# Altium PCB nse5310-module.PcbDoc
Units mm, origin at the board's own origin, x right, y up, seen from the top; angles counter-clockwise.
Board outline 25 x 25 mm, 2 copper layers (Top Layer, Bottom Layer), stack 1.581 mm thick; 22 components, 23 nets, 126 pads, 31 vias.
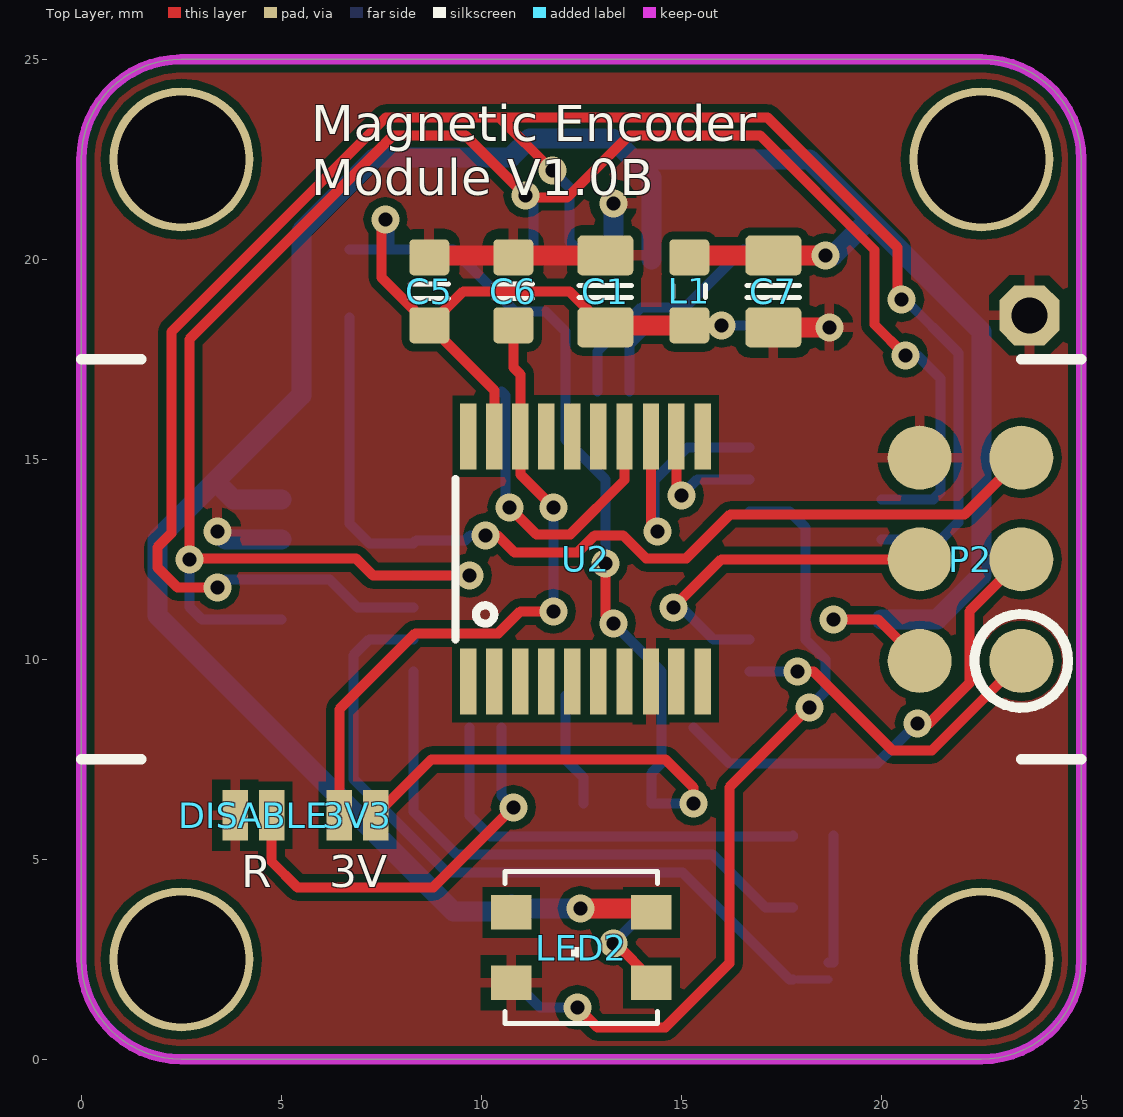
[diagram p0: Top Layer view]
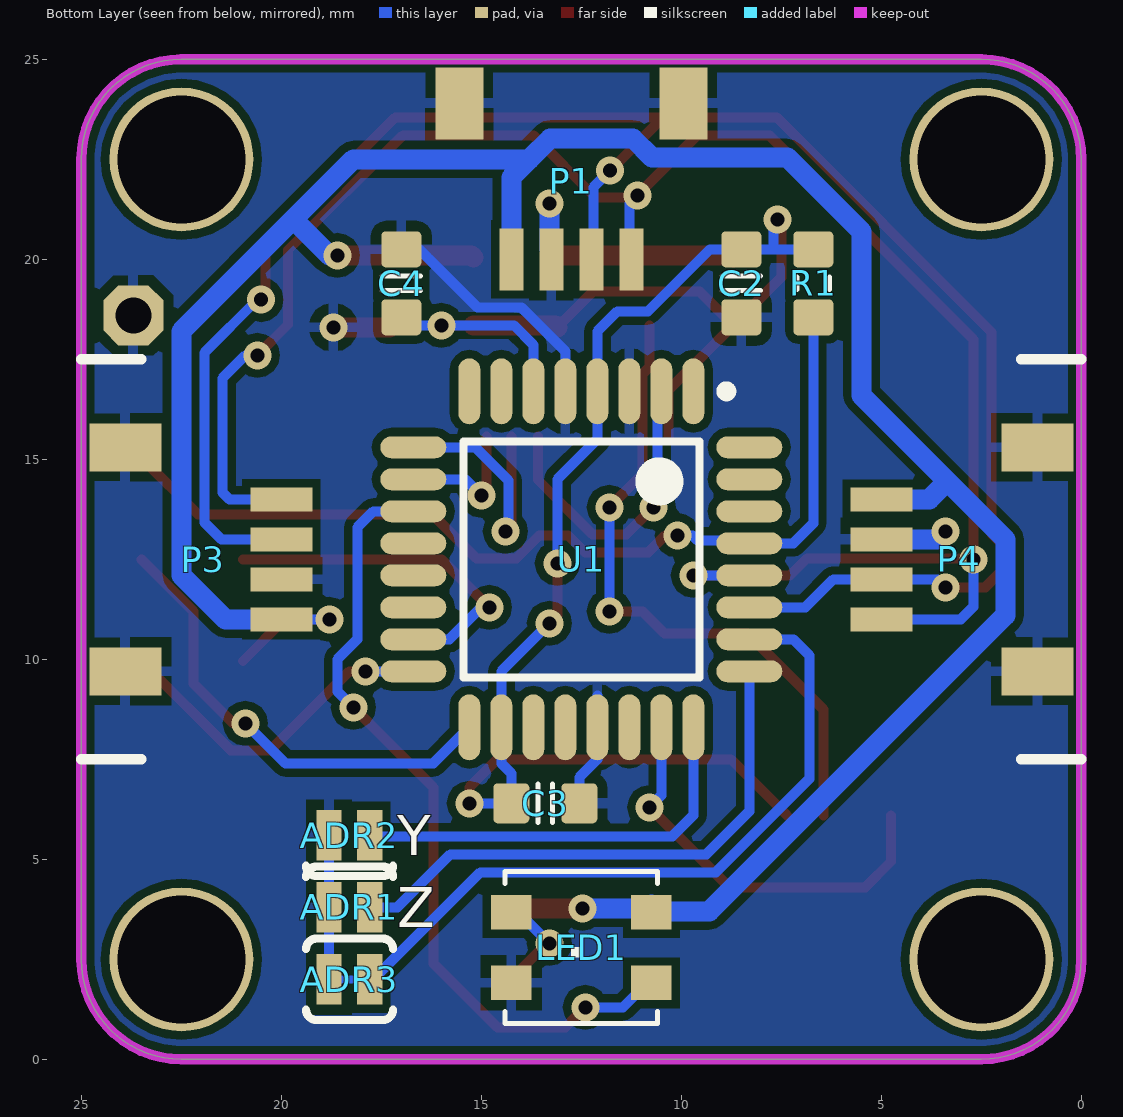
[diagram p1: Bottom Layer view, seen from below]
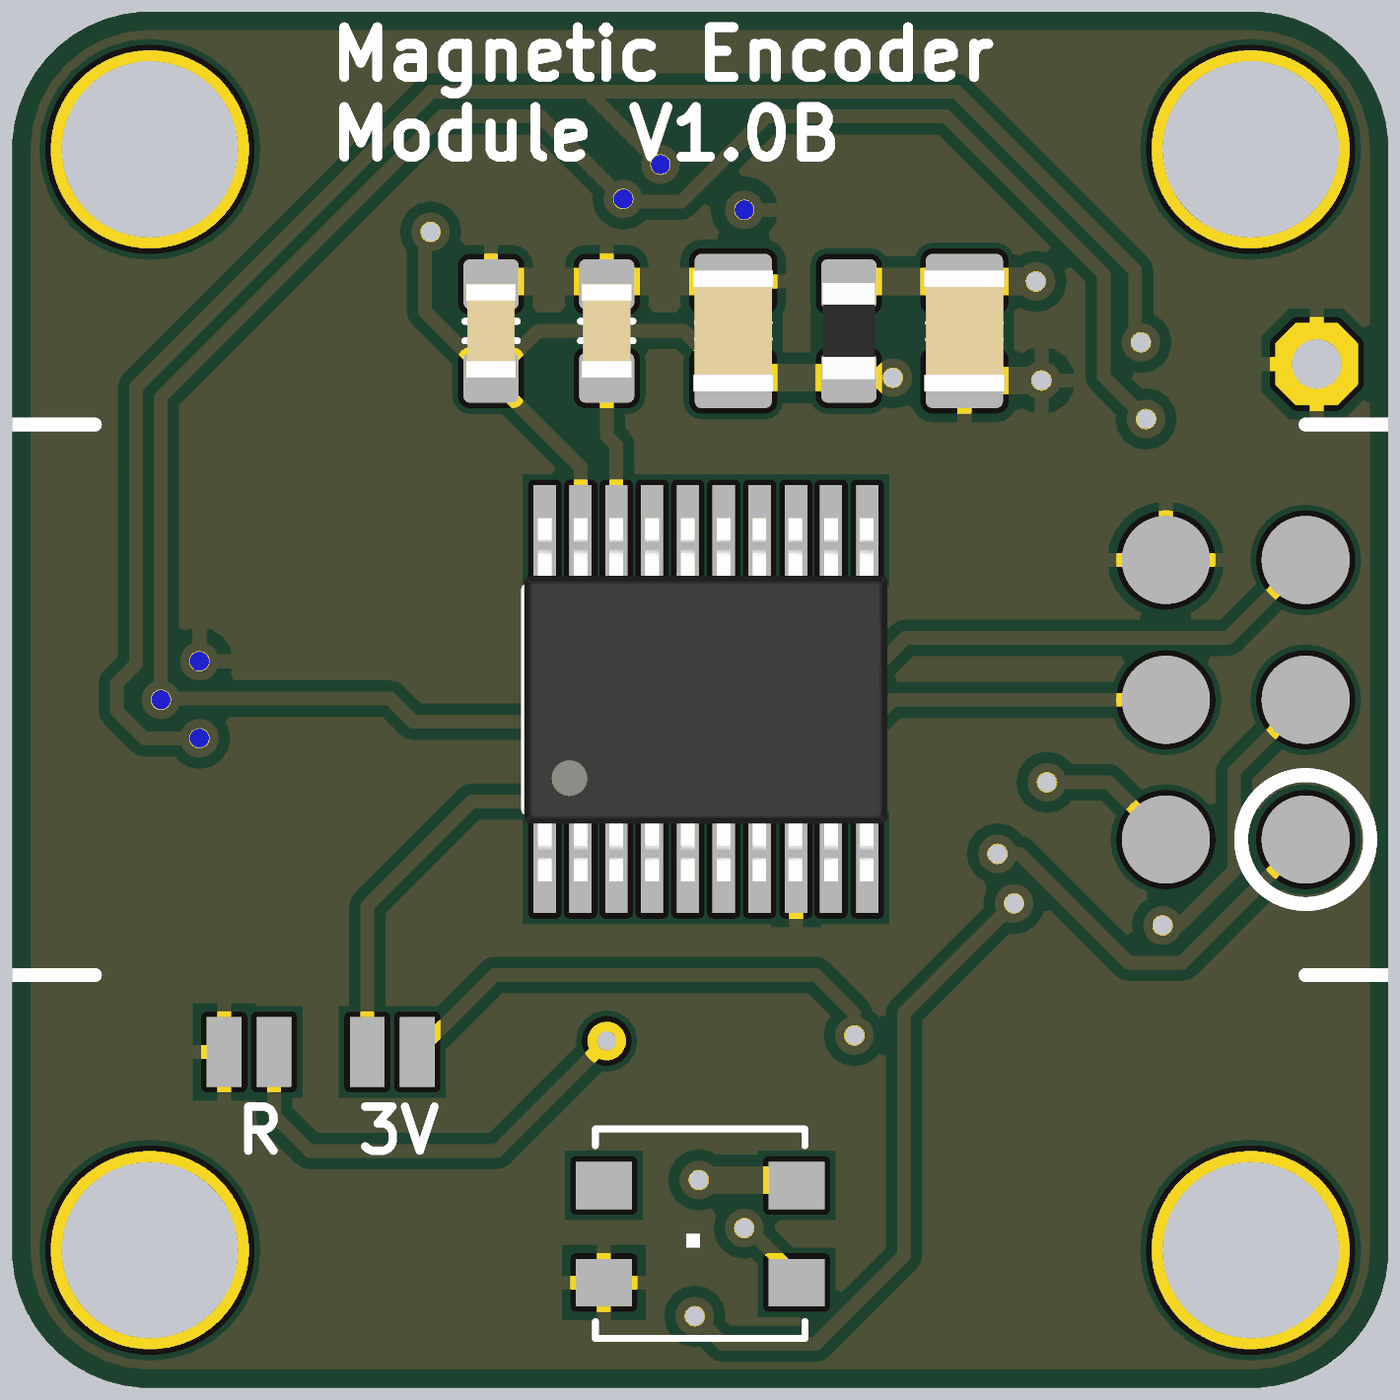
[diagram p2: 3D render of the assembled board from above, using the file's embedded part models]
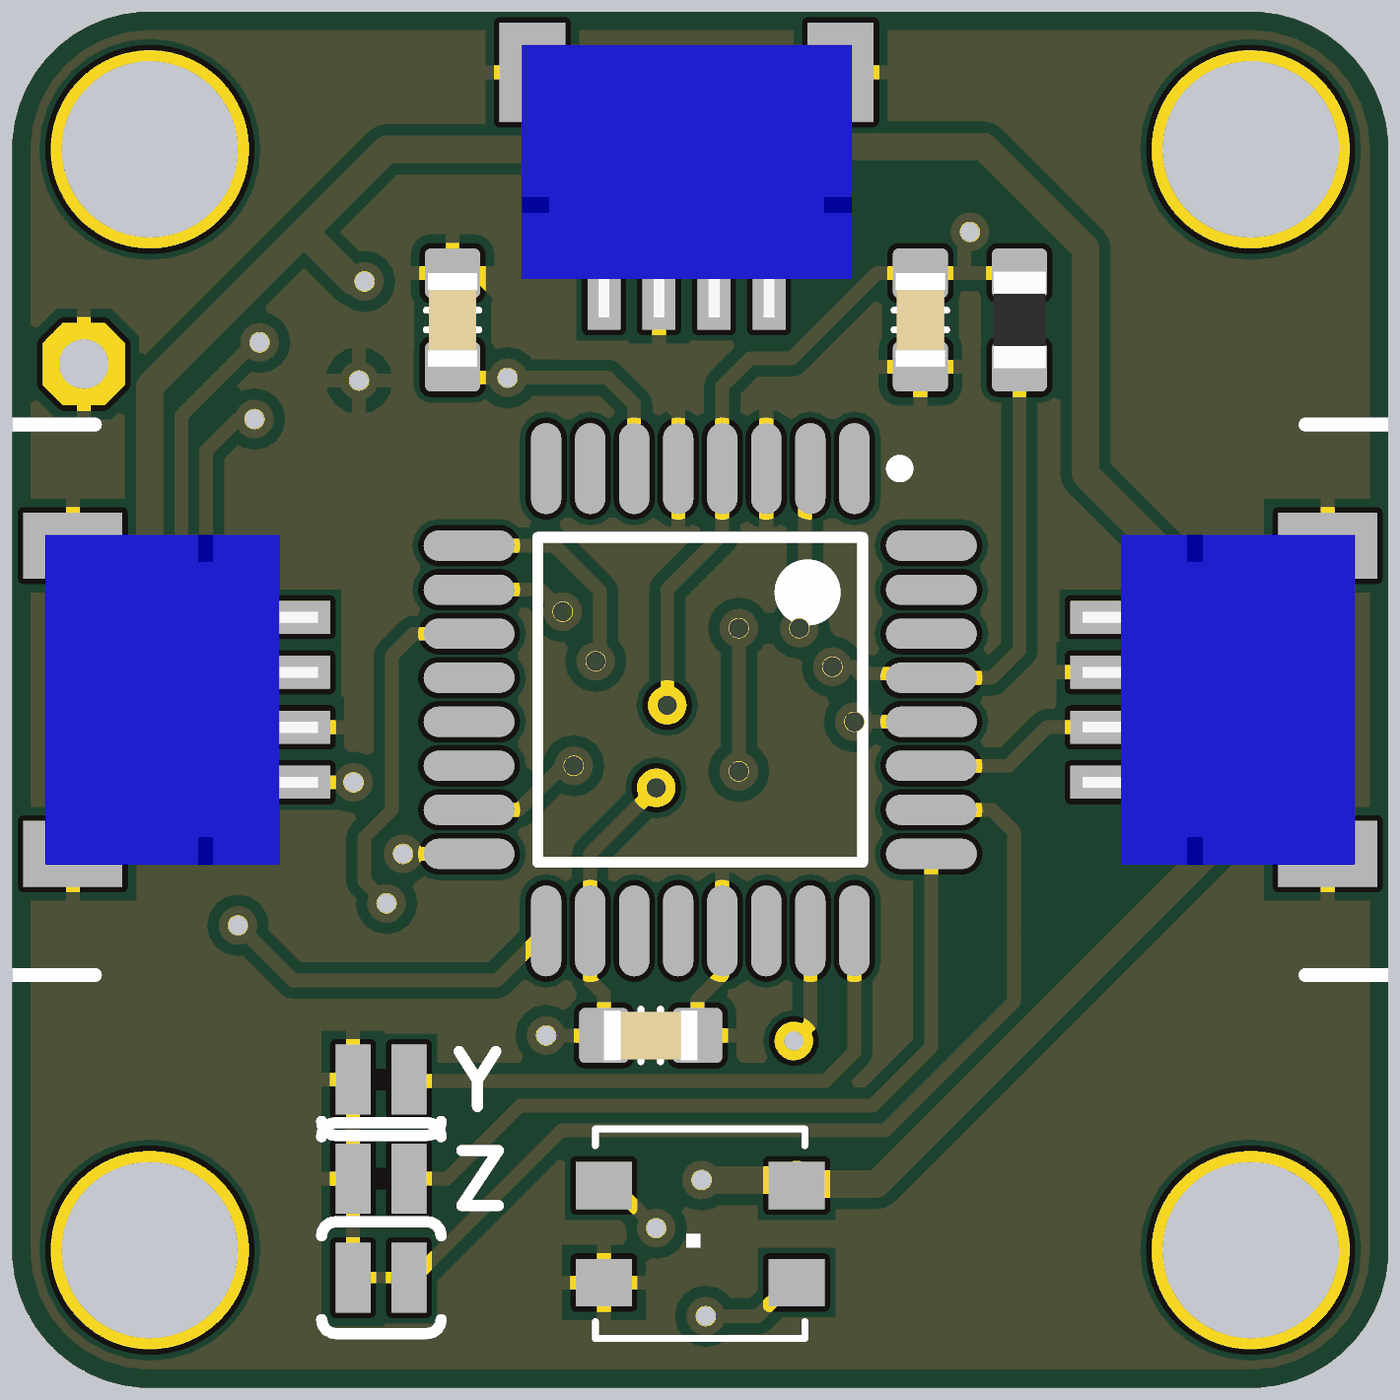
[diagram p3: 3D render of the assembled board from below, using the file's embedded part models]

## Layer stack, top to bottom
Top Solder: solder mask 0.0102, Solder Resist, Dk 3.5
Top Layer: signal copper 0.0356
Dielectric1: dielectric 1.51, FR-4, Dk 4.8
Bottom Layer: signal copper 0.0356
Bottom Solder: solder mask 0.0102, Solder Resist, Dk 3.5

## Board outline
0,2.5 0,22.5 cw(c2.5,22.5) 2.5,25 22.5,25 cw(c22.5,22.5) 25,22.5 25,2.5 cw(c22.5,2.5) 22.5,0 2.5,0 cw(c2.5,2.5)

## Design rules (kind name [scope] priority, off if disabled: settings)
Clearance [All] p1: gap=0.2
FabricationTestPointUsage TestPointUsage [All] p1: valid=0 allowmultiple=FALSE
FabricationTestpoint Testpoint [All] p1: side=3 testpointundercomponent=TRUE minsize=1.016 maxsize=2.54 preferedsize=1.524 minholesize=0 maxholesize=1.016 preferedholesize=0.813 testpointgrid=0.025 allowsidetop=TRUE allowsidebottom=TRUE usegrid=TRUE gridtolerance=0
HoleSize [All] p1: absolutevalues=TRUE maxlimit=3.5 minlimit=0.025 maxpercent=80.000 minpercent=20.000
PolygonConnect [All] p1: connectstyle=Relief reliefconductorwidth=0.254 reliefentries=4 polygonreliefangle="90 Angle" airgapwidth=0.254
RoomDefinition RoomDefinition_1 [InComponentClass('Top Side Components')] p1: confinementstyle=ConfineOut formatcopy=TRUE lockcomponents=FALSE outline 25.5,7.5 16.5,7.5 16.5,17.5 25.5,17.5
RoomDefinition [InComponentClass('Top Side Components')] p2: confinementstyle=ConfineOut formatcopy=TRUE lockcomponents=FALSE outline 9,7.5 -0.5,7.5 -0.5,17.5 9,17.5
RoutingVias [All] p1: holewidth=0.35 width=0.7 viastyle="Through Hole" minholewidth=0.35 minwidth=0.7 maxholewidth=1 maxwidth=1.4
SilkToSolderMaskClearance SilkscreenOverComponentPads [IsPad] p1: minsilkscreentomaskgap=0.254 clearancetoexposedcopper=TRUE
SolderMaskExpansion [All] p1: expansion=0.102
Width [All] p1: maxlimit=1 minlimit=0.25 preferedwidth=0.25
26 further rules are at their usual default settings.

## Components (designator, comment, footprint, x,y, rotation, side; value= is the part's Value field where it differs from the comment)
3V3 "JUMPER-PAD-2-NO" PAD-JUMPER-2-NO_NO_SILK 6.9,6.1 r0 top
ADR1 "JUMPER-PAD-2-NC_BY_TRACE" PAD-JUMPER-2-NC_BY_TRACE_YES_SILK#1 18.3,3.8 r180 bottom
ADR2 "JUMPER-PAD-2-NC_BY_TRACE" PAD-JUMPER-2-NC_BY_TRACE_YES_SILK#1 18.3,5.6 r180 bottom
ADR3 "JUMPER-PAD-2-NC_BY_TRACE" PAD-JUMPER-2-NC_BY_TRACE_YES_SILK#2 18.3,2 r180 bottom
C1 "approved sub OK" CAPC2012X135N 13.1,19.2 r90 top
C2 "approved sub OK" CAPC1608X90N 8.5,19.4 r270 bottom
C3 "approved sub OK" CAPC1608X90N 13.4,6.4 r180 bottom
C4 "approved sub OK" CAPC1608X90N 17,19.4 r90 bottom
C5 "approved sub OK" CAPC1608X90N 8.7,19.2 r90 top
C6 "approved sub OK" CAPC1608X90N 10.8,19.2 r90 top
C7 "approved sub OK" CAPC2012X135N 17.3,19.2 r270 top
DISABLE "JUMPER-PAD-2-NO" PAD-JUMPER-2-NO_NO_SILK 4.3,6.1 r0 top
L1 "7447965" RESC1608X55N 15.2,19.2 r270 top
LED1 "WS2812B3535" LED3535 12.5,2.8 r0 bottom
LED2 "WS2812B3535" LED3535 12.5,2.8 r180 top
P1 "JST-SH 4P" SM04B-SRSS-TB 14.25,20 r90 bottom locked
P2 "ISP" "ICSP Pads - SMD" 23.5,9.96 r180 top
P3 "JST-SH 4P" SM04B-SRSS-TB 20,11 r0 bottom locked
P4 "JST-SH 4P" SM04B-SRSS-TB 5,14 r180 bottom locked
R1 "Thick Film" RESC1608X55N 6.7,19.4 r270 bottom
U1 "ATmega328-AU" 32A_N 12.5,12.5 r270 bottom locked
U2 "NSE-5310" NSE-5310 13.25,12.5 r0 top

## Footprints (in the part's own frame and the unit in brackets; to place one, negate y for a bottom-side part, rotate by r counter-clockwise, add the part's x,y. Pads: shape width x height; smd on the part's side, far side on the other; paste and mask are expansions set on the pad)
32A_N [mm] "Thin QFP, 32-Leads, Body 7x7mm, Pitch 0.8mm, IPC Medium Density"
  oval 1.65x0.55 smd: 1(-4.2,2.8) 2(-4.2,2) 3(-4.2,1.2) 4(-4.2,0.4) 5(-4.2,-0.4) 6(-4.2,-1.2) 7(-4.2,-2) 8(-4.2,-2.8) 17(4.2,-2.8) 18(4.2,-2) 19(4.2,-1.2) 20(4.2,-0.4) 21(4.2,0.4) 22(4.2,1.2) 23(4.2,2) 24(4.2,2.8)
  oval 0.55x1.65 smd: 9(-2.8,-4.2) 10(-2,-4.2) 11(-1.2,-4.2) 12(-0.4,-4.2) 13(0.4,-4.2) 14(1.2,-4.2) 15(2,-4.2) 16(2.8,-4.2) 25(2.8,4.2) 26(2,4.2) 27(1.2,4.2) 28(0.4,4.2) 29(-0.4,4.2) 30(-1.2,4.2) 31(-2,4.2) 32(-2.8,4.2)
  silkscreen extent -4.32,-2.95 2.95,3.75, body extent -3.5,-3.5 3.5,3.5, height 1.2
CAPC1608X90N [mm] "Chip Capacitor, Body 1.6x0.8mm, EIA 0603, IPC Medium Density"
  round 0.254 on Mech15: 0(0,0)
  rrect25% 0.9x1 smd: 1(-0.85,0) 2(0.85,0)
  Top Layer pour cut-out: -0.6,0.5 -0.4,0.7 0.4,0.7 0.6,0.5 0.6,-0.5 0.4,-0.7 -0.4,-0.7 -0.6,-0.5
  silkscreen extent -0.18,-0.48 0.18,0.48, body extent -0.85,-0.45 0.85,0.45, height 0.89
CAPC2012X135N [mm] "Chip Capacitor, Body 2.0x1.2mm, EIA 0805, IPC Medium Density"
  round 0.254 on Mech15: 0(0,0)
  rrect25% 1x1.4 smd: 1(-0.9,0) 2(0.9,0)
  Top Layer pour cut-out: -0.675,0.7 -0.475,0.9 0.475,0.9 0.675,0.7 0.675,-0.7 0.475,-0.9 -0.475,-0.9 -0.675,-0.7
  silkscreen extent -0.15,-0.65 0.15,0.65, body extent -1.1,-0.72 1.1,0.73, height 1.34
"ICSP Pads - SMD" [mm]
  round 1.6 smd: 0(0,0) 1(2.54,0) 2(0,-2.54) 3(2.54,-2.54) 4(0,-5.08) 5(2.54,-5.08)
  silkscreen extent -1.17,-1.17 1.17,1.17
LED3535 [mil]
  rect 40x34 smd: 1(-68.9,35) 2(-68.9,-34.45) 3(69,-34.45) 4(69,35)
  silkscreen extent -75,-75 75,75
NSE-5310 [mil]
  rect 16x65 smd: 1(-140.75,-120.08) 2(-115.16,-120.08) 3(-89.57,-120.08) 4(-63.98,-120.08) 5(-38.39,-120.08) 6(-12.8,-120.08) 7(13,-120.08) 8(39,-120.08) 9(64,-120.08) 10(90,-120.08) 11(90,121) 12(64,121) 13(39,121) 14(13,121) 15(-12.8,121) 16(-38.39,121) 17(-63.98,121) 18(-89.57,121) 19(-115.16,121) 20(-140.75,121)
  silkscreen extent -154,-79 -115,79, body extent -156,-130 104,130, height 47
PAD-JUMPER-2-NC_BY_TRACE_YES_SILK#1 [mm]
  rect 0.635x1.27 smd: 1(-0.508,0) 2(0.508,0)
  silkscreen extent -1.08,0.76 1.09,1.02
PAD-JUMPER-2-NC_BY_TRACE_YES_SILK#2 [mm]
  rect 0.635x1.27 smd: 1(-0.508,0) 2(0.508,0)
  Top Layer lines w0.203: 0.381,0 -0.381,0
  silkscreen extent -1.08,-1.02 1.09,1.02
PAD-JUMPER-2-NO_NO_SILK [mm]
  rect 0.635x1.27 smd: 1(-0.45,0) 2(0.457,0)
RESC1608X55N [mm] "Chip Resistor, Body 1.6x0.8mm, EIA 0603, IPC Medium Density"
  round 0.254 on Mech15: 0(0,0)
  rrect25% 0.9x1 smd: 1(-0.85,0) 2(0.85,0)
  Top Layer pour cut-out: -0.6,0.5 -0.4,0.7 0.4,0.7 0.6,0.5 0.6,-0.5 0.4,-0.7 -0.4,-0.7 -0.6,-0.5
  silkscreen extent -0.15,-0.41 0.15,0.41, body extent -0.87,-0.47 0.88,0.48, height 0.54
SM04B-SRSS-TB [mm]
  rect 1.55x0.6 smd: 0(0,0) 1(0,-1) 2(0,-2) 3(0,-3)
  rect 1.8x1.2 smd: ""(3.9,-4.3) ""(3.9,1.3)
  body extent -0.55,-4.5 4.4,1.5, height 2.96

## Part data
C1 C7: library part CAPC_10u_0805_10V, "Capacitor SMD Cer 10uF 10% 10V X5R 0805"
C2 C3 C4 C5: library part CAPC_100n_0603_X7R_50V_10%, "Capacitor SMD Cer 100nF 10% 50V X7R 0603"
C6: library part CAPC_2u2_0603_10V_10%, "Capacitor SMD Cer 2.2uF 10% 10V X5R 0603"
L1: "SMD-Multilayer Inductor WE-MI, L = 1.00 µH"
P1 P3 P4: library part SM04B-SRSS-TB
P2: library part "ISP Header"
R1: library part RES_10K_0603_5%, "Resistor SMD chip 10k Ohm 0.1W 5% 0603"
U1: "8-bit AVR Microcontroller, 32KB Flash, 1KB EEPROM, 2KB SRAM, 32-pin TQFP, Industrial Grade (-40°C to 85°C)"

## Free pads (board coordinates)
  round 3.6 hole 3.2: 0(2.5,2.5) 0(2.5,22.5) 0(22.5,2.5) 0(22.5,22.5)
  oct 1.5x1.5 hole 0.9: 2(23.7,18.6)

## Via types
v1: diameter 0.7, hole 0.35, Top Layer to Bottom Layer, tented both sides, 28 vias
v2: diameter 0.7, hole 0.35, Top Layer to Bottom Layer, 3 vias

## Nets (pads, with @x,y where several pads share a name; then routed paths per layer and width w, separated by ;. In a path a pad name is that pad's centre, name@x,y a point inside that pad or via, vN(x,y) a via of type N, cw(c..) or ccw(c..) an arc to the next point about the centre after c; other vN are vias at no path point)
A: U2.4
ADR1: ADR1.2 U1.25 | length 14
  Bottom Layer w0.25: U1.25 8.3,6.2 9.375,5.125 15.775,5.125 17.1,3.8 ADR1.2
ADR2: ADR2.2 U1.24 | length 10.5
  Bottom Layer w0.25: U1.24 9.7,6.1 10.225,5.575 17.792,5.575 ADR2.2
ADR3: ADR3.2 U1.26 | length 17.8
  Bottom Layer w0.25: U1.26 7.2,10.5 6.8,10.1 6.8,7.013 9.138,4.675 15.025,4.675 17.7,2 ADR3.2
B: U2.5
CLK: U1.9 U2.13 | length 6.5
  Top Layer w0.25: U2.13 14.241,13.241 14.281,13.2 v1(14.4,13.2)
  Bottom Layer w0.25: v1(14.4,13.2) 14.325,13.275 14.325,14.475 15.15,15.3 U1.9
CSN: U1.2 U2.14 | length 7.9
  Top Layer w0.25: v1(10.7,13.8) 11.375,13.125 12.225,13.125 13.58,14.48 U2.14
  Bottom Layer w0.25: U1.2 10.6,16.6 10.6,14 10.8,13.8 v1(10.7,13.8)
DIO: U1.10 U2.12 | length 3.4
  Top Layer w0.25: U2.12 14.876,14.224 v1(15,14.1)
  Bottom Layer w0.25: v1(15,14.1) 15.4,14.5 U1.10
GND: ADR1.1 ADR2.1 ADR3.1 C1.2 C2.2 C3.2 C4.2 C5.2 C6.2 C7.2 DISABLE.1 LED1.4 LED2.4 P1. P1.1 P2.5 P3. P3.1 P4. P4.1 pad.2 U1.3 U1.5 U1.21 U2.8 | length 21
  Top Layer w0.5: C5.2 8.75,20.1 C1.2 ; C7.2 v1(18.7,18.3)
  Bottom Layer w0.25: U1.21@12.1,9.1 U1.21 12.1,7.5 12.55,7.05 C3.2 ; U1.5 12.9,17.7 14,18.8 15.1,18.8 16.55,20.25 C4.2 ; ADR3.1@18.681,2.427 18.808,2.427 ADR1.1 ADR2.1
  Bottom Layer w0.5: v1(3.4,13.2) 3.6,13 P4.1 ; P1.1@13.3,20.25 v1(13.3,21.4)
I: U2.7
MISO: P2.0 U1.16 | length 8.5
  Top Layer w0.25: v1(17.9,9.7) 18.3,9.7 20.275,7.725 21.265,7.725 P2.0
  Bottom Layer w0.25: U1.16 v1(17.9,9.7)
MOSI: P2.3 U1.15 | length 9.2
  Top Layer w0.25: v1(14.8,11.3) 16,12.5 P2.3
  Bottom Layer w0.25: v1(14.8,11.3) 14.8,11.5 15.8,10.5 U1.15
NEOPIXEL: LED2.3
Net3V3_1: 3V3.1 C6.1 U2.18 | length 16.6
  Top Layer w0.25: 3V3.1 6.45,8.75 8.35,10.65 9.795,10.65 10.425,10.65 10.975,11.2 v1(11.8,11.2) ; C6.1 10.8,17.3 10.975,17.125 U2.18 10.975,14.625 v1(11.8,13.8)
  Bottom Layer w0.25: v1(11.8,11.2) v1(11.8,13.8)
NetDISABLE_2: DISABLE.2 U1.23 | length 10.4
  Top Layer w0.25: DISABLE.2 4.757,4.943 5.4,4.3 8.8,4.3 v2(10.8,6.3)
  Bottom Layer w0.25: U1.23 10.5,6.6 v2(10.8,6.3)
NetLED1_3: LED1.3 LED2.1 | length 2.6
  Top Layer w0.25: v1(13.3,2.9) 13.361,2.9 LED2.1@14.25,2.011
  Bottom Layer w0.25: v1(13.3,2.9) 14.175,3.775 LED1.3@14.253,3.775
RST: P2.4 R1.2 U1.29 | length 23.9
  Top Layer w0.25: v1(10.1,13.1) 10.4,13.1 10.825,12.675 12.411,12.675 12.836,13.1 13.545,13.1 14.12,12.525 15.125,12.525 16.225,13.625 22.085,13.625 P2.4
  Bottom Layer w0.25: R1.2 6.7,13.4 7.2,12.9 U1.29 8.375,12.975 9.6,12.975 9.725,13.1 v1(10.1,13.1)
SCK: P2.2 U1.17 | length 11.7
  Top Layer w0.25: v1(20.9,8.4) 21.2,8.4 22.2,9.4 22.2,11.2 P2.2
  Bottom Layer w0.25: U1.17 16.2,7.4 19.9,7.4 v1(20.9,8.4)
SCL: P1.3 P3.3 P4.3 U1.28 | length 49.6
  Top Layer w0.25: v1(2.7,12.5) v1@2.7,12.525 ; v1(9.7,12.1) 7.286,12.1 6.861,12.525 v1@2.7,12.525 ; v1(20.6,17.6) 19.832,18.368 19.832,20.232 16.964,23.1 13.7,23.1 12.148,21.548 11.152,21.548 v1(11.1,21.6) 9.6,23.1 7.8,23.1 2.7,18 v1@2.7,12.525
  Bottom Layer w0.25: v1(2.7,12.5) 2.7,11.313 3.013,11 P4.3 ; U1.28 v1(9.7,12.1) ; v1(11.1,21.6) 11.3,21.4 11.3,20.05 P1.3 ; P3.3 21.3,14 21.475,14.175 21.475,17.025 20.9,17.6 v1(20.6,17.6)
SDA: P1.2 P3.2 P4.2 U1.27 | length 48.8
  Top Layer w0.25: v1(3.4,11.8) 2.4,11.8 1.9,12.3 1.9,12.8 2.25,13.15 2.25,18.186 7.614,23.55 10.45,23.55 ; v1(11.777,22.223) 10.45,23.55 ; v1(20.507,18.993) 20.4,19.1 20.4,20.3 17.15,23.55 10.45,23.55
  Bottom Layer w0.25: v1(3.4,11.8) 3.6,12 P4.2 6.2,12 6.9,11.3 U1.27 ; v1(11.777,22.223) 12.2,21.8 12.2,20.45 12.4,20.25 12.2,20.05 P1.2 ; P3.2 21.5,13 21.925,13.425 21.925,17.662 20.593,18.993 v1(20.507,18.993)
VDD: 3V3.2 C1.1 C2.1 C3.1 C4.1 C5.1 L1.2 R1.1 U1.4 U1.6 U1.18 U2.19 | length 49.5
  Top Layer w0.25: 3V3.2 8.757,7.5 14.6,7.5 15.3,6.8 v1(15.3,6.4) ; v1@7.5,20.9 7.5,19.55 C5.1 ; U2.19 10.325,16.725 C5.1 ; v2(13.1,12.4) 13.1,11.1 v2(13.3,10.9) ; C1.1 12.2,19.2 9.55,19.2 C5.1 ; L1.2 15.25,18.3 15.3,18.35 v1(16,18.35)
  Top Layer w0.5: C1.1 13.15,18.35 L1.2
  Bottom Layer w0.25: R1.1 7.7,20.25 ; v1@7.5,20.9 7.7,20.7 7.7,20.25 ; v2(13.1,12.4) 13.1,14.5 12.1,15.5 U1.4 12.1,18.2 11.6,18.7 10.836,18.7 9.286,20.25 C2.1 7.7,20.25 ; v2(13.3,10.9) 14.5,9.7 U1.18 14.5,7.4 14.25,7.15 C3.1 v1(15.3,6.4) ; U1.6 13.7,17.864 14.186,18.35 v1(16,18.35) 16.8,18.35 C4.1
  other v1: 7.6,21
VIN: C7.1 L1.1 LED1.2 LED2.2 P1.0 P2.1 P3.0 P4.0 | length 68.8
  Top Layer w0.25: v1(18.8,11) 19.92,11 P2.1
  Top Layer w0.5: v1(12.475,3.775) LED2.2@14.25,3.775 ; L1.1 15.25,20.1 C7.1 v1(18.6,20.1)
  Bottom Layer w0.25: v1(18.8,11) P3.0
  Bottom Layer w0.5: P4.0 3.8,14 3.35,14.45 ; LED1.2@10.75,3.775 v1(12.475,3.775) ; LED1.2@10.75,3.875 10.575,3.7 9.3,3.7 1.9,11.1 1.9,13 3.35,14.45 ; P1.0 14.25,22.05 13.8,22.5 ; v1(18.6,20.1) 18.8,20.1 19.7,21 ; P3.0 21.4,11 22.5,12.1 22.5,18.2 19.7,21 ; 3.35,14.45 5.5,16.6 5.5,20.7 7.35,22.55 10.736,22.55 11.209,23.023 13.277,23.023 13.8,22.5 ; 13.8,22.5 18.2,22.5 19.7,21
WS2812B: LED1.1 U1.11 | length 20.3
  Top Layer w0.25: v1(12.4,1.3) 12.9,0.8 14.6,0.8 16.2,2.4 16.2,6.8 v1(18.2,8.8)
  Bottom Layer w0.25: LED1.1@10.75,2.011 11.461,1.3 v1(12.4,1.3) ; U1.11 17.7,13.7 18.1,13.3 18.1,10.5 18.6,10 18.6,9.2 v1(18.2,8.8)
pads on no net: C1.0 C2.0 C3.0 C4.0 C5.0 C6.0 C7.0 L1.0 R1.0 U1.1 U1.7 U1.8 U1.12 U1.13 U1.14 U1.19 U1.20 U1.22 U1.30 U1.31 U1.32 U2.1 U2.2 U2.3 U2.6 U2.9 U2.10 U2.11 U2.15 U2.16 U2.17 U2.20

## Polygon pours and split planes (outlines as drawn)
GND on Bottom Layer "Bottom Layer-GND" (solid, remove dead copper, pour order 0): 25,25 25,0 0,0 0,25
GND on Top Layer "Top VCC" (solid, pour order 2): 25,25 25,0 0,0 0,25

## Keep-outs
Keep-Out Layer:
  the board outline again, w0.254

## Silkscreen, mask and mechanical layers (free items; w line width, h text height)
Top Overlay:
  lines w0.254: 0,7.5 1.5,7.5 ; 0,17.5 1.5,17.5 ; 23.5,7.5 25,7.5 ; 23.5,17.5 25,17.5
  text "Magnetic Encoder / Module V1.0B" at 5.75,21.6 h0.9
  text "R" at 4,4.3 h0.8
  text "3V" at 6.2,4.3 h0.8
  text "A" at 15.5,-9 h1.4
Bottom Overlay:
  lines w0.254: 0,7.5 1.5,7.5 ; 0,17.5 1.5,17.5 ; 23.5,7.5 25,7.5 ; 23.5,17.5 25,17.5
  text "Y" at 17.108,5.1 h1
  text "Z" at 17.108,3.3 h1
  text "A" at 12.5,-11 h1.4
Bottom Solder:
  rectangle: 18.008,5.4 18.508,5.8
  rectangle: 18.008,3.6 18.508,4
Mechanical 4:
  circle w0.254: c22.5,22.5 r1.6
  circle w0.254: c2.5,22.5 r3
  circle w0.254: c2.5,2.5 r3
  circle w0.254: c22.5,2.5 r3
  circle w0.254: c22.5,22.5 r3
  text "Hole Diameter" at 29,21 h1
  text "Bolt Clearance" at 28,1 h1
  text "All units are in millimetres" at 0,-3 h1
Mechanical 16:
  drawing of 1874 lines, arcs and shapes, not listed
  text "1" at -84.785,94.869 h1.78
  text "2" at -12.141,94.869 h1.78
  text "3" at 61.011,94.869 h1.78
  text "4" at 133.909,94.869 h1.78
  text "A" at -119.126,71.857 h1.78
  text "A" at 167.894,71.857 h1.78
  text "B" at -119.126,23.8 h1.78
  text "B" at 167.894,23.8 h1.78
  text "C" at -119.126,-24.714 h1.78
  text "C" at 167.894,-24.714 h1.78
  text "ENGINEER:" at 52.959,-61.722 h1.14
  text "TITLE:" at 91.059,-61.722 h1.14
  text "PCB DESIGNER:" at 52.959,-69.215 h1.14
  text "D" at -119.126,-72.72 h1.78
  text "D" at 167.894,-72.72 h1.78
  text "DATE:" at 52.959,-76.962 h1.14
  text "PART NO.:" at 91.059,-76.962 h1.14
  text "REV:" at 144.399,-76.962 h1.14
  text "Altium Limited" at 19.939,-79.502 h1.78
  text ".PRINT_DATE" at 54.229,-80.01 h1.78
  text "12a Rodborough Rd" at 19.939,-82.042 h1.78
  text "Frenchs Forest" at 19.939,-84.582 h1.78
  text "FILE NAME:" at 52.959,-84.582 h1.14
  text "DWG NO:" at 91.059,-84.582 h1.14
  text "SCALE:" at 144.399,-84.582 h1.14
  text "NSW 2086" at 19.939,-87.122 h1.78
  text ".PCB_FILE_NAME_NO_PATH" at 54.229,-87.63 h1.78
  text "1" at -84.785,-93.091 h1.78
  text "2" at -12.141,-93.091 h1.78
  text "3" at 61.011,-93.091 h1.78
  text "4" at 133.909,-93.091 h1.78

## Dimensions
2.5,22.5 to 22.5,22.5 on Mechanical 16
0,22.5 to 25,22.5 on Mechanical 16
2.5,25 to 2.5,0 on Mechanical 16
22.5,22.5 to 41,24 on Mechanical 4
22.5,2.5 to 41,4 on Mechanical 4
2.5,22.5 to 2.5,2.5 on Mechanical 16